# Altium PCB batterypack(1).PcbDoc
Units mm, origin at the board's own origin, x right, y up, seen from the top; angles counter-clockwise.
Board outline 95.87 x 90.16 mm, 2 copper layers (F.Cu, B.Cu); 14 components, 0 nets, 20 pads, 2 vias.
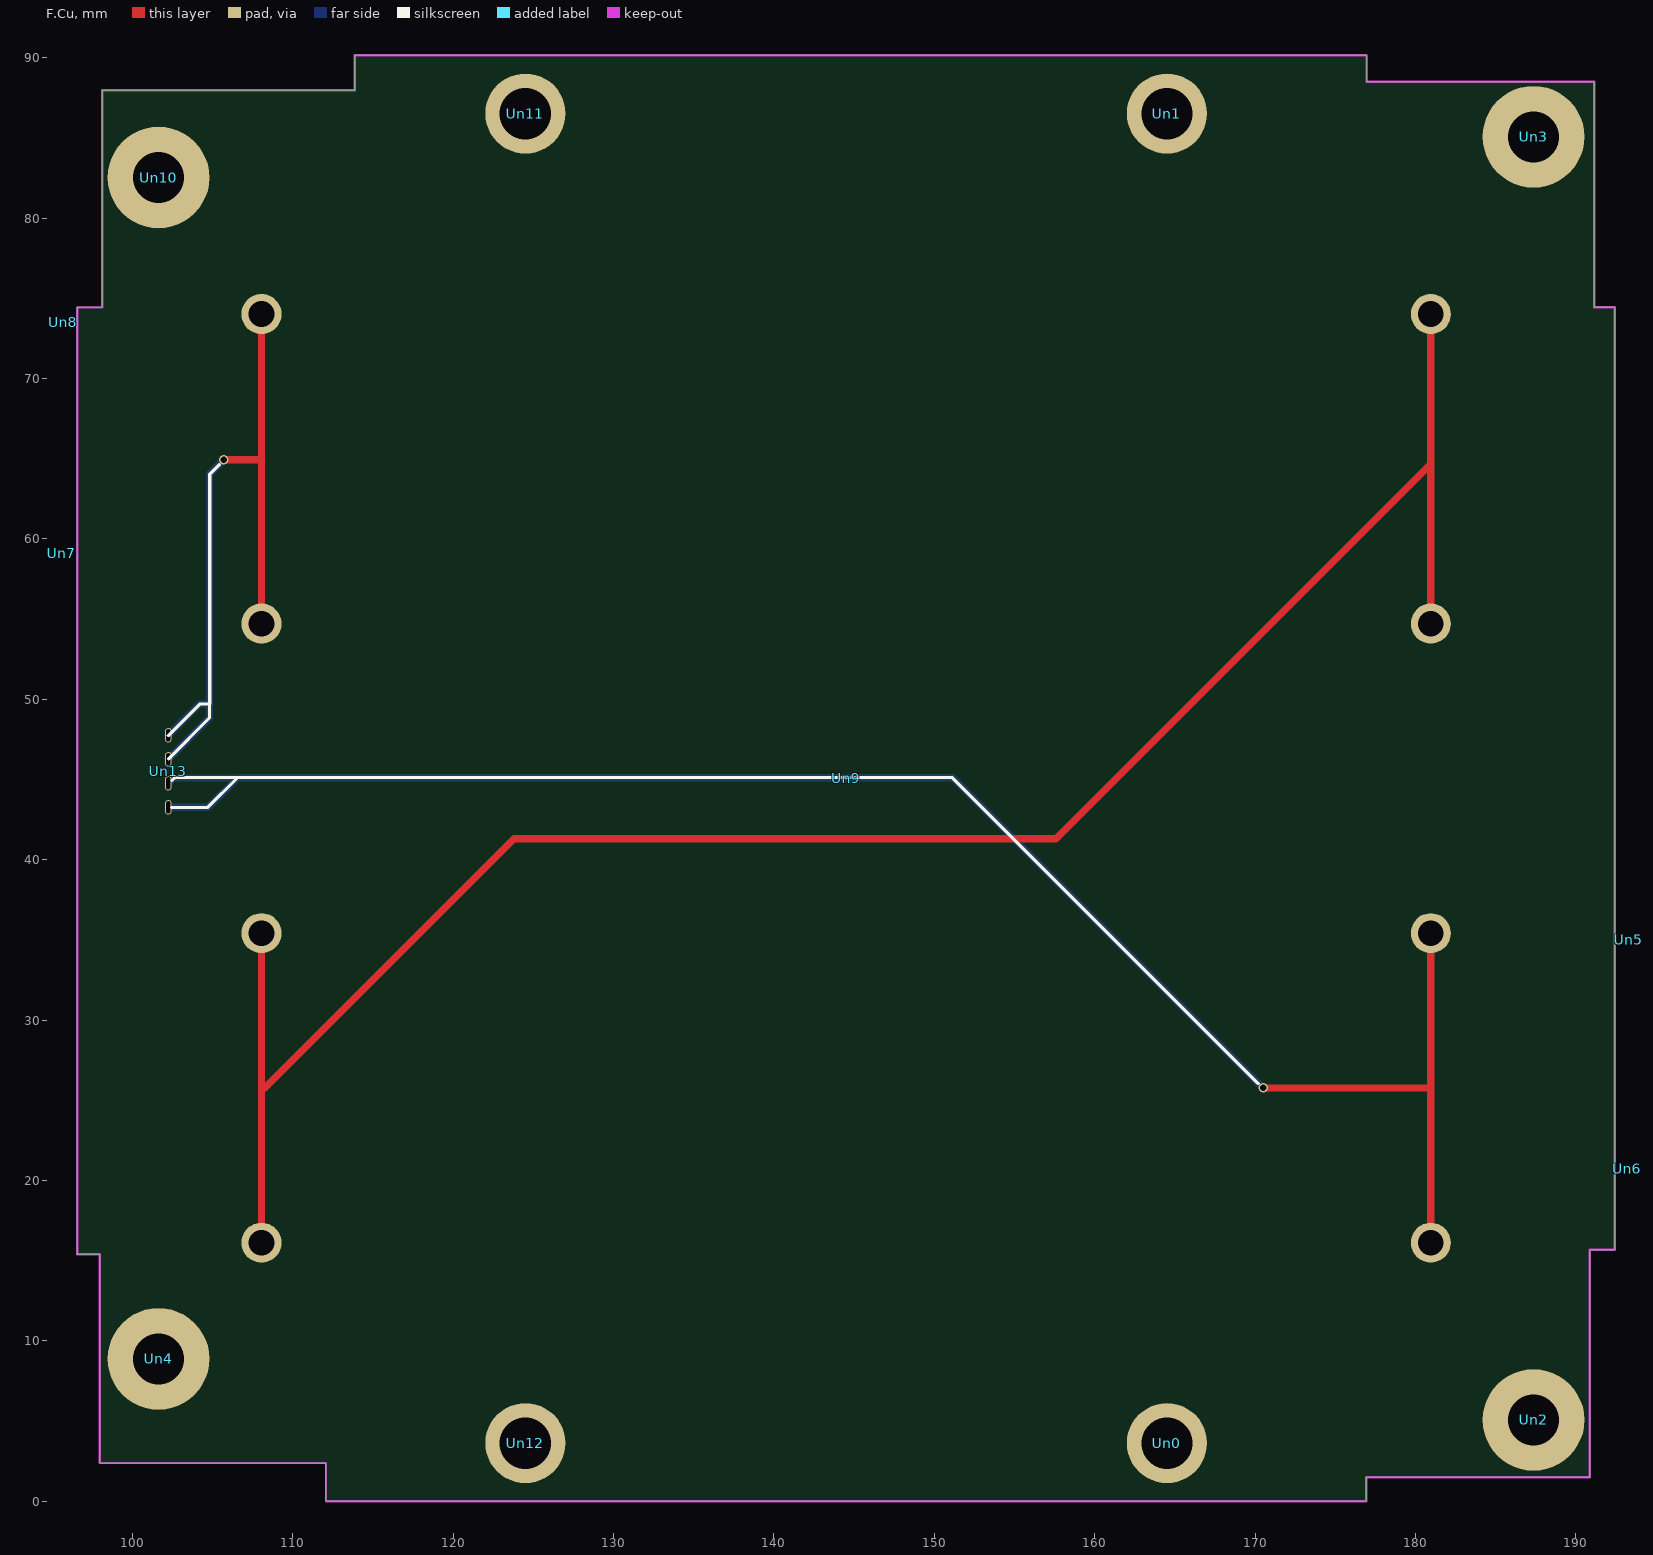
[diagram p0: F.Cu view]
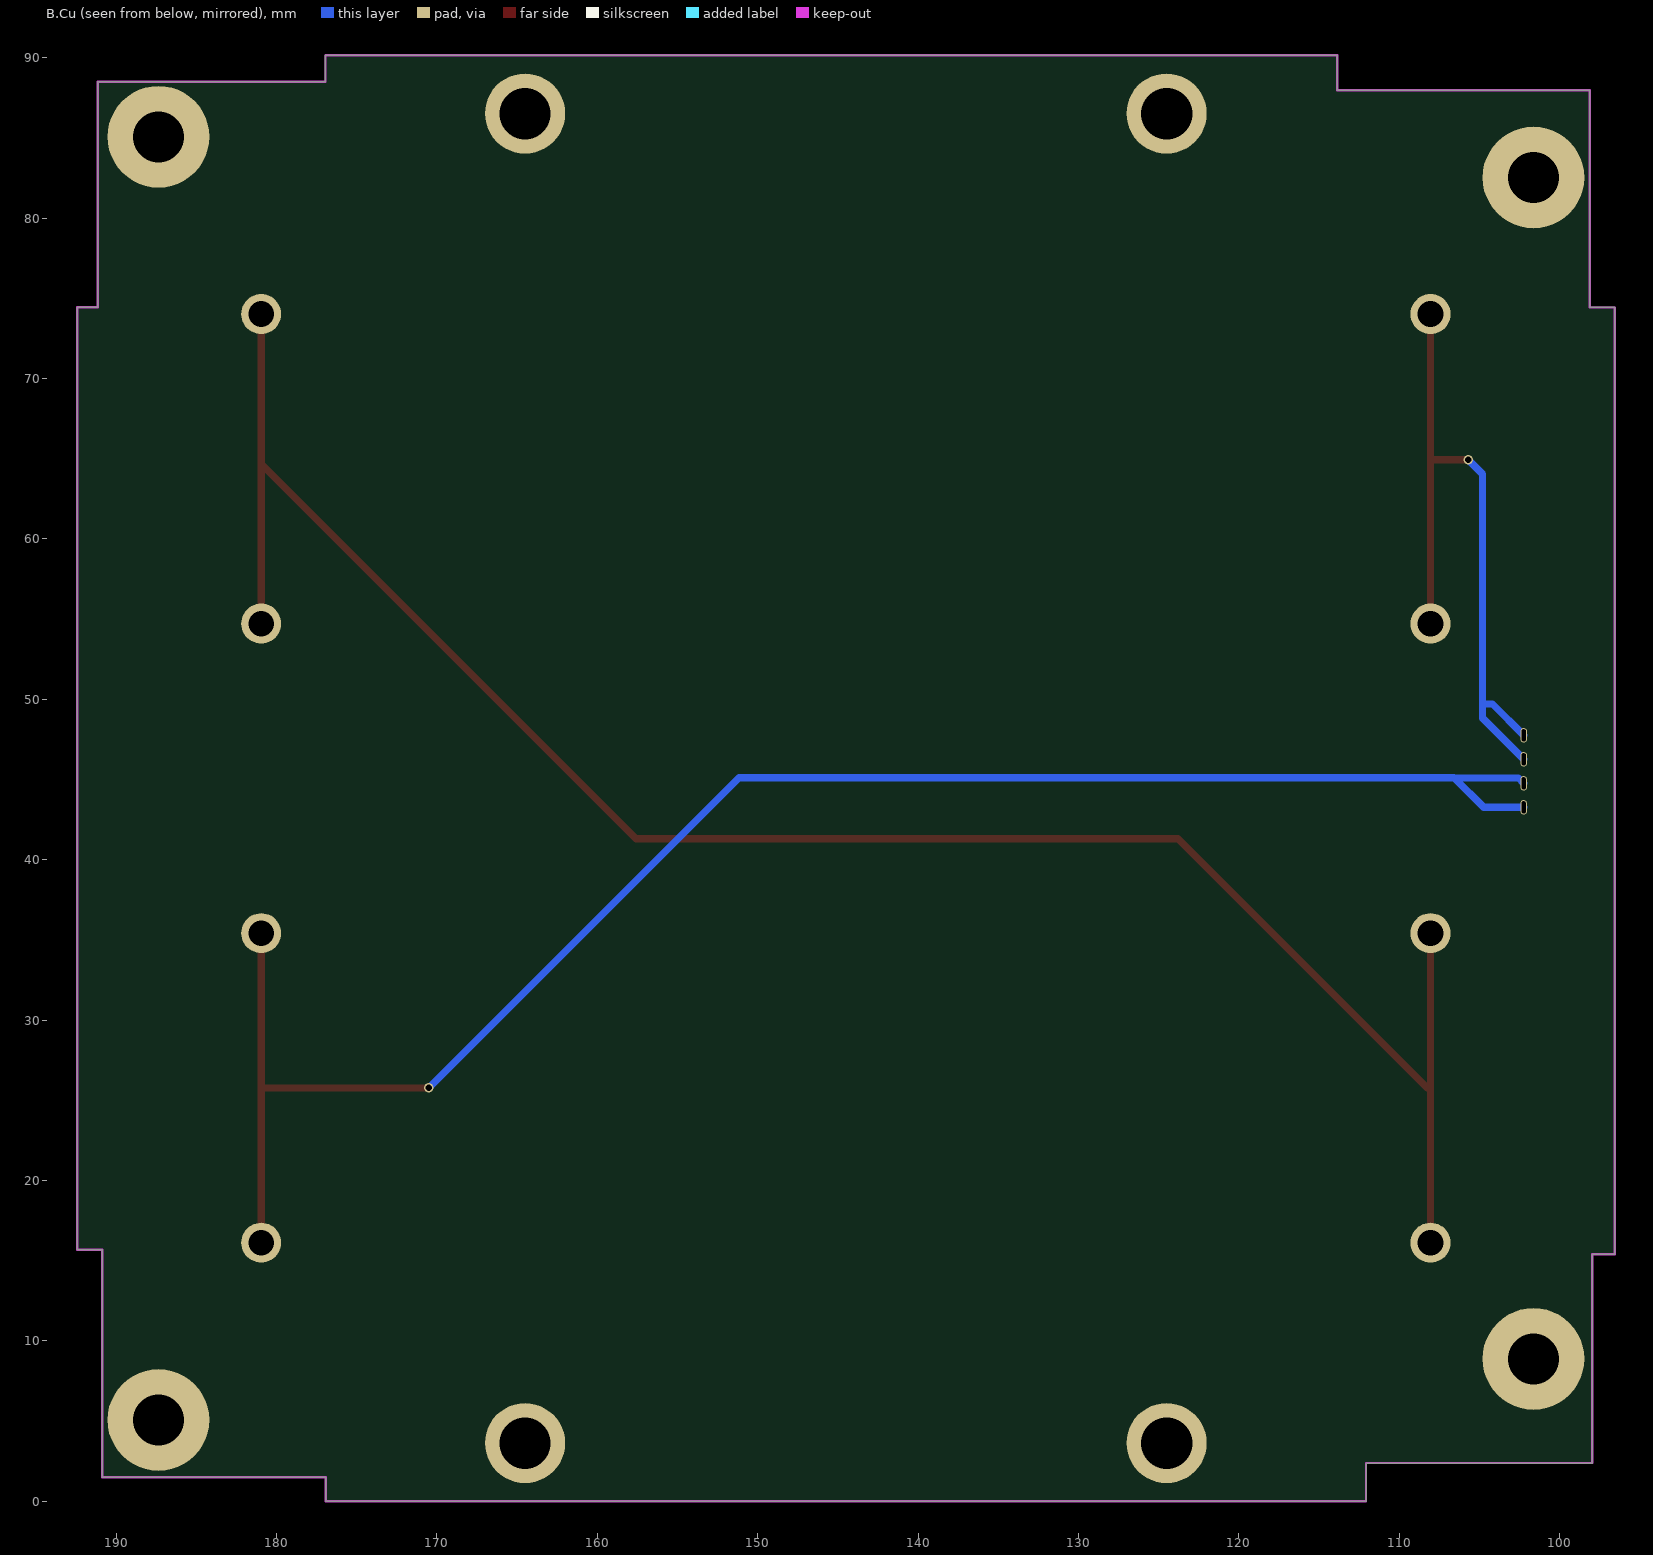
[diagram p1: B.Cu view, seen from below]

## Layer stack, top to bottom
F.Mask: solder mask 0.0102, Solder Resist, Dk 3.5
F.Cu: signal copper 0.0356
Dielectric 1: dielectric 0.32, FR-4, Dk 4.8
B.Cu: signal copper 0.0356
B.Mask: solder mask 0.0102, Solder Resist, Dk 3.5

## Board outline
113.86,90.16 176.95,90.16 176.95,88.51 191.14,88.51 191.14,74.44 192.43,74.44 192.43,15.69 190.86,15.69 190.86,1.49 176.93,1.49 176.93,0 112.07,0 112.07,2.38 97.96,2.38 97.96,15.39 97.67,15.39 96.56,15.39 96.56,74.43 98.12,74.43 98.12,87.98 113.86,87.98 113.86,90.16

## Design rules (kind name [scope] priority, off if disabled: settings)
Clearance "Clearence 0.2_NetClass" [InNetClass('Default')] p1: gap=0.2 ignorepadtopadclearanceinfootprint=FALSE
HoleSize "Hole Size (Default)" [All] p1: absolutevalues=TRUE maxlimit=10 minlimit=0.3 maxpercent=80.000 minpercent=20.000
MinimumSolderMaskSliver [All] p1: minsoldermaskwidth=0
PolygonConnect [All] p1: connectstyle=Direct reliefconductorwidth=0.254 reliefentries=4 polygonreliefangle="90 Angle" airgapwidth=0.254
RoutingVias [All] p1: holewidth=0.711 width=1.27 viastyle="Through Hole" minholewidth=0.711 minwidth=1.27 maxholewidth=0.711 maxwidth=1.27
SilkToSilkClearance [All] p1: silktosilkclearance=0
SilkToSolderMaskClearance [IsPad] p1: minsilkscreentomaskgap=0 clearancetoexposedcopper=TRUE
SolderMaskExpansion [All] p1: expansion=0.102 istentingtop=FALSE
Width [All] p1: maxlimit=10 minlimit=0.2 preferedwidth=0.25 minimp=50.000000 maximp=50.000000 favimp=50.000000
26 further rules are at their usual default settings.

## Components (designator, comment, footprint, x,y, rotation, side; value= is the part's Value field where it differs from the comment)
Un0 "Comment" harness#1 163.19,-76.25 r0 top
Un1 "Comment" harness#2 164.505,86.14 r0 top
Un2 "Comment" pc104holes#1 187.555,4.715 r0 top
Un3 "Comment" pc104holes#2 187.565,84.835 r0 top
Un4 "Comment" pc104holes#3 101.975,4.605 r0 top
Un5 "Comment" input 193.3,35.02 r0 top
Un6 "Comment" input 193.2,20.72 r0 top
Un7 "Comment" input 95.6,59.12 r0 top
Un8 "Comment" input 95.7,73.52 r0 top
Un9 "Comment" battery 116.7,74.02 r0 top
Un10 "Comment" pc104holes#4 101.635,82.535 r0 top
Un11 "Comment" harness#3 124.505,86.52 r0 top
Un12 "Comment" harness#3 124.505,3.62 r0 top
Un13 "Comment" connector 102.24,45.52 r90 top

## Footprints (in the part's own frame and the unit in brackets; to place one, negate y for a bottom-side part, rotate by r counter-clockwise, add the part's x,y. Pads: shape width x height; smd on the part's side, far side on the other; paste and mask are expansions set on the pad)
battery [mm]
  round 2.5 hole 1.6 paste-2539.97 mask+0.2: 2(-8.65,0) 4(64.26,0) 10(-8.65,-19.3) 11(-8.65,-38.6) 12(-8.65,-57.9) 13(64.26,-19.3) 14(64.26,-38.6) 15(64.26,-57.9)
connector [mm]
  rrect100% 0.9x0.4 hole 0.25 slot 0.75 at 0 deg paste-2539.97 mask+0.2: 21(-2.253,0) 31(-0.756,0) 41(0.741,0) 51(2.238,0)
harness#1 [mm]
  round 5 hole 3.2 paste-2539.97 mask+0.2: 1(1.315,79.87)
harness#2 [mm]
  round 5 hole 3.2 paste-2539.97 mask+0.2: 1(0,0.38)
harness#3 [mm]
  round 5 hole 3.2 paste-2539.97 mask+0.2: 1(0,0)
input [mm]
pc104holes#1 [mm]
  round 6.35 hole 3.18 paste-2539.97 mask+0.2: 1(-0.19,0.35)
pc104holes#2 [mm]
  round 6.35 hole 3.18 paste-2539.97 mask+0.2: 1(-0.2,0.24)
pc104holes#3 [mm]
  round 6.35 hole 3.18 paste-2539.97 mask+0.2: 1(-0.34,4.27)
pc104holes#4 [mm]
  round 6.35 hole 3.18 paste-2539.97 mask+0.2: 1(0,0)

## Part data
Un0 Un1 Un11 Un12: library part harness
Un2 Un3 Un4 Un10: library part pc104holes
Un5 Un6 Un7 Un8: library part input
Un9: library part battery
Un13: library part connector

## Via types
v1: diameter 0.6, hole 0.4, F.Cu to B.Cu, tented both sides, 2 vias

## Nets (pads, with @x,y where several pads share a name; then routed paths per layer and width w, separated by ;. In a path a pad name is that pad's centre, name@x,y a point inside that pad or via, vN(x,y) a via of type N, cw(c..) or ccw(c..) an arc to the next point about the centre after c; other vN are vias at no path point)
pads on no net: Un0.1 Un1.1 Un2.1 Un3.1 Un4.1 Un9.2 Un9.4 Un9.10 Un9.11 Un9.12 Un9.13 Un9.14 Un9.15 Un10.1 Un11.1 Un12.1 Un13.21 Un13.31 Un13.41 Un13.51
copper on no net: | length 284
  F.Cu w0.45: v1(105.7,64.93) 105.71,64.94 108.05,64.94 ; 108.05,16.12 108.05,25.17 108.05,25.76 ; 108.05,35.42 108.05,25.76 ; 108.05,54.72 108.05,64.37 108.05,64.6 108.05,64.94 ; 108.05,74.02 108.05,65.12 108.05,64.94 ; v1(170.51,25.77) 180.96,25.77 ; 180.96,16.12 180.96,25.77 ; 180.96,35.42 180.96,26.22 180.96,25.77 ; 180.96,54.72 180.96,64.37 180.96,64.67 ; 180.96,74.02 180.96,65.72 180.96,64.67 ; 108.05,25.76 108.26,25.76 123.8,41.3 123.83,41.3 157.59,41.3 180.96,64.67
  B.Cu w0.45: 102.24,43.267 104.737,43.267 106.565,45.095 ; 102.24,44.764 102.571,45.095 106.565,45.095 ; 102.24,46.261 104.8,48.821 104.8,49.71 ; 102.24,47.758 104.192,49.71 104.8,49.71 ; v1(105.7,64.93) 104.8,64.03 104.8,49.71 ; v1(170.51,25.77) 151.17,45.11 106.58,45.11 106.565,45.095

## Keep-outs
Edge.Cuts:
  lines w0.15: 96.56,15.39 96.56,74.43 ; 96.56,15.39 97.67,15.39 ; 96.56,15.39 96.56,74.43 ; 96.56,15.39 97.67,15.39 ; 96.56,74.43 98.12,74.43 ; 96.56,74.43 98.12,74.43 ; 97.67,15.39 97.96,15.39 ; 97.67,15.39 97.96,15.39 ; 97.96,2.38 97.96,15.39 ; 97.96,2.38 112.07,2.38 ; 97.96,2.38 97.96,15.39 ; 97.96,2.38 112.07,2.38 ; 98.12,74.43 98.12,87.98 ; 98.12,74.43 98.12,87.98 ; 98.12,87.98 113.86,87.98 ; 98.12,87.98 113.86,87.98 ; 112.07,0 112.07,2.38 ; 112.07,0 176.93,0 ; 112.07,0 112.07,2.38 ; 112.07,0 176.93,0 ; 113.86,87.98 113.86,90.16 ; 113.86,87.98 113.86,90.16 ; 113.86,90.16 176.95,90.16 ; 113.86,90.16 176.95,90.16 ; 176.93,0 176.93,1.49 ; 176.93,0 176.93,1.49 ; 176.93,1.49 190.86,1.49 ; 176.93,1.49 190.86,1.49 ; 176.95,88.51 191.14,88.51 ; 176.95,88.51 176.95,90.16 ; 176.95,88.51 191.14,88.51 ; 176.95,88.51 176.95,90.16 ; 190.86,1.49 190.86,15.69 ; 190.86,1.49 190.86,15.69 ; 190.86,15.69 192.43,15.69 ; 190.86,15.69 192.43,15.69 ; 191.14,74.44 192.43,74.44 ; 191.14,74.44 191.14,88.51 ; 191.14,74.44 192.43,74.44 ; 191.14,74.44 191.14,88.51 ; 192.43,15.69 192.43,74.44 ; 192.43,15.69 192.43,74.44

## Silkscreen, mask and mechanical layers (free items; w line width, h text height)
F.SilkS:
  lines w0.2: 102.24,47.74 104.2,49.7 104.81,49.7 104.81,48.85 102.26,46.3 102.26,46.29 ; 102.44,43.26 104.7,43.26 106.5,45.06 106.56,45.12 102.65,45.12 102.47,44.94 102.49,44.96 ; 104.82,49.71 104.82,64.04 105.41,64.63 ; 106.59,45.12 151.13,45.12 170.21,26.04